# Altium PCB 咸味勺子-20210715.PcbDoc
Units mm, origin at the board's own origin, x right, y up, seen from the top; angles counter-clockwise.
Board outline 22 x 73.69 mm, 2 copper layers (Top Layer, Bottom Layer); 62 components, 36 nets, 177 pads, 22 vias.
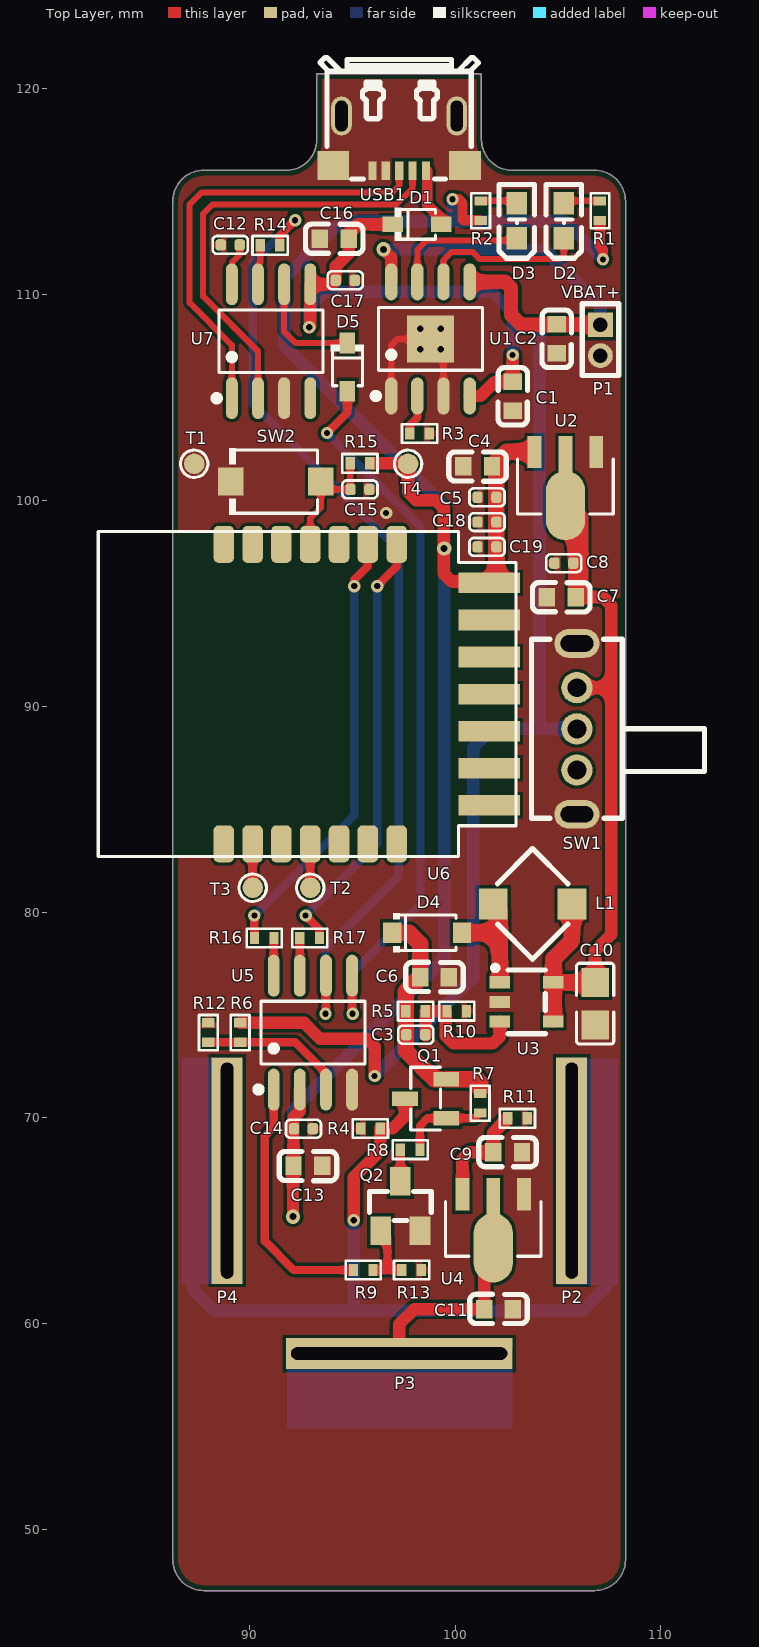
[diagram p0: Top Layer view]
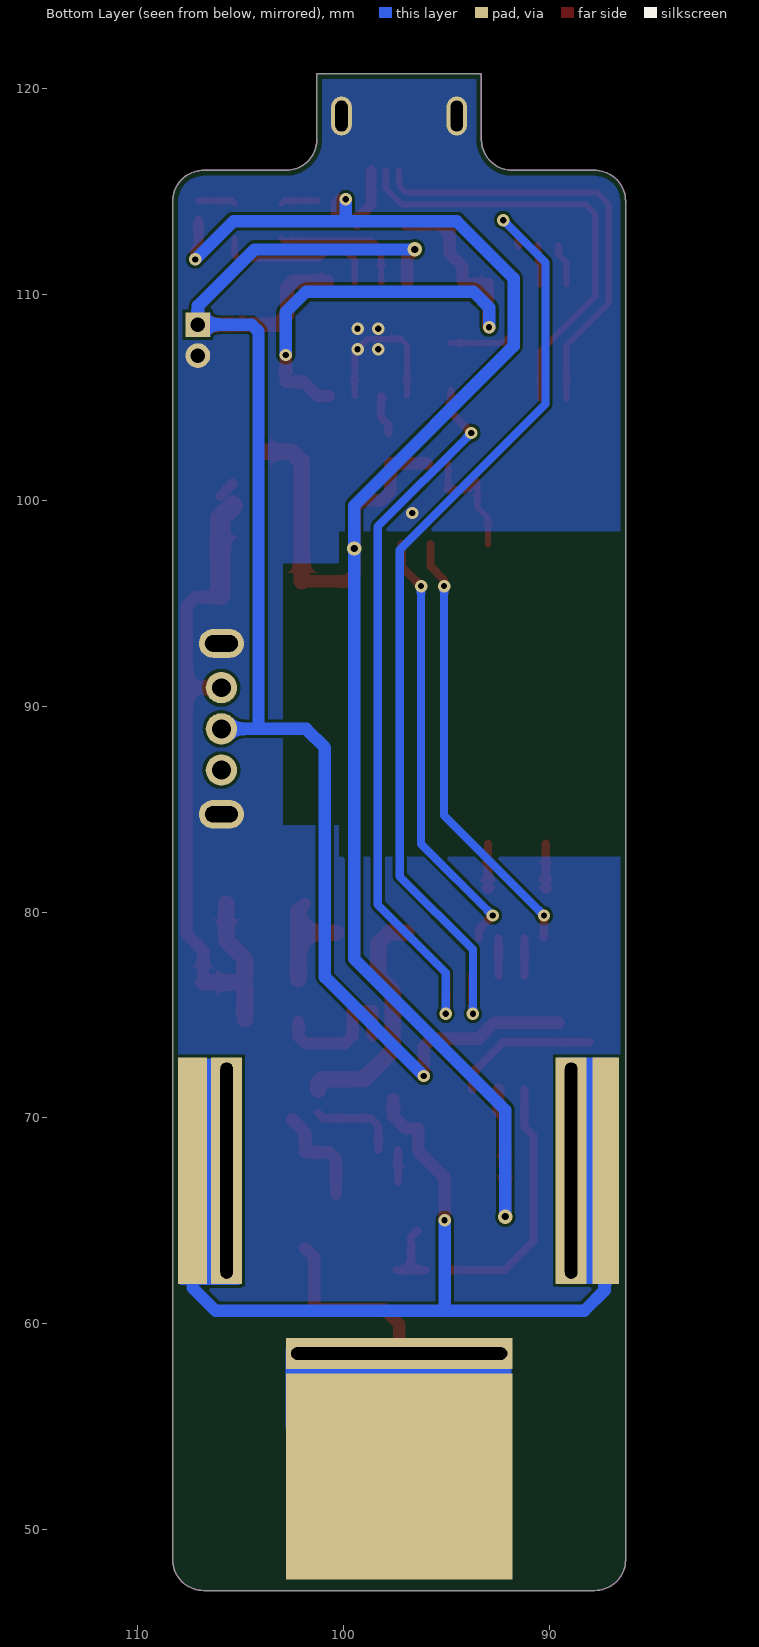
[diagram p1: Bottom Layer view, seen from below]

## Layer stack, top to bottom
Top Solder: solder mask 0.0102, Solder Resist, Dk 3.5
Top Layer: signal copper 0.0356
Dielectric 1: dielectric 0.32, FR-4, Dk 4.8
Bottom Layer: signal copper 0.0356
Bottom Solder: solder mask 0.0102, Solder Resist, Dk 3.5

## Board outline
86.282,48.534 ccw(c87.782,48.534) 87.782,47.034 106.782,47.034 ccw(c106.782,48.534) 108.282,48.534 108.282,114.534 ccw(c106.782,114.534) 106.782,116.034 102.782,116.034 cw(c102.782,117.534) 101.282,117.534 101.282,120.726 93.282,120.726 93.282,117.534 cw(c91.782,117.534) 91.782,116.034 87.782,116.034 ccw(c87.782,114.534) 86.282,114.534

## Design rules (kind name [scope] priority, off if disabled: settings)
BoardOutlineClearance [All] p1: gap=0.254 ignorepadtopadclearanceinfootprint=FALSE except(0: Arc-SplitContinuation Track-SplitContinuation SMDPad-SplitContinuation THPad-SplitContinuation Via-SplitContinuation Fill-SplitContinuation Poly-SplitContinuation Region-SplitContinuation Text-SplitContinuation)
Clearance outline [InPoly vs OnLayer('Keep-Out Layer')] p1: gap=0.254 ignorepadtopadclearanceinfootprint=FALSE except(0: Arc-Hole Track-Hole SMDPad-Hole THPad-Hole Via-Hole Fill-Hole Poly-Hole Region-Hole Text-Hole)
Clearance same-via [IsVia vs IsVia] p2: gap=0 ignorepadtopadclearanceinfootprint=FALSE except(0.076: SMDPad-Via; 0.152: Via-Via)
Clearance [All] p3: gap=0.152 ignorepadtopadclearanceinfootprint=FALSE except(0: Arc-Hole Track-Hole SMDPad-Hole THPad-Hole Via-Hole Fill-Hole Poly-Hole Region-Hole Text-Hole)
ComponentClearance [All] p1: gap=0 collisioncheckmode=3 verticalgap=0 showdistances=FALSE
MinimumSolderMaskSliver [All] p1: minsoldermaskwidth=0.076
PolygonConnect IsPad [All] p1: connectstyle=Direct reliefconductorwidth=0.254 reliefentries=4 polygonreliefangle="90 Angle" airgapwidth=0.254
PolygonConnect Other [All] p2: connectstyle=Direct reliefconductorwidth=0.254 reliefentries=4 polygonreliefangle="90 Angle" airgapwidth=0.254
RoutingVias [All] p1: holewidth=0.203 width=0.406 viastyle="Through Hole" minholewidth=0.2 minwidth=0.3 maxholewidth=0.6 maxwidth=1
SilkToSilkClearance [All] p1: silktosilkclearance=0.01
SilkToSolderMaskClearance [IsPad] p1: minsilkscreentomaskgap=0.01 clearancetoexposedcopper=TRUE
SolderMaskExpansion [All] p1: expansion=0.051
Width [All] p1: maxlimit=5 minlimit=0.152 preferedwidth=0.178
26 further rules are at their usual default settings.

## Components (designator, comment, footprint, x,y, rotation, side; value= is the part's Value field where it differs from the comment)
C1 "106" C0603 102.794,105.054 r270 top
C2 "10uF/16V" C0603 104.927,107.848 r270 top
C3 "22pF" C0402_GRM15 98.092,74.041 r0 top
C4 "106" C0603 101.092,101.651 r180 top
C5 "104" C0402_GRM15 101.549,100.152 r180 top
C6 "1uF" C0603 98.998,76.835 r0 top
C7 "106" C0603 105.156,95.301 r180 top
C8 "104" C0402_GRM15 105.283,96.952 r180 top
C9 "106" C0603 102.551,68.326 r0 top
C10 "4.7uF" JMK212BJ475KG-T 107.152,79.353 r90 top
C11 "106" C0603 102.108,60.706 r0 top
C12 "0.1uF/50V" C0402_GRM15 89.075,112.412 r180 top
C13 "22uF/16V" C0603 92.848,67.666 r180 top
C14 "0.1uF/16V" C0402_GRM15 92.634,69.469 r180 top
C15 "104/10V" C0402_GRM15 95.377,100.533 r0 top
C16 "10uF/16V" C0603 94.132,112.7 r0 top
C17 "0.1uF/16V" C0402_GRM15 94.666,110.693 r180 top
C18 "104" C0402_GRM15 101.549,98.946 r180 top
C19 "103" C0402_GRM15 101.549,97.739 r180 top
D1 "1N5819WS" 1N5819WS 101.049,113.244 r0 top
D2 "绿色" OSR50603C1E 157.836,581.279 r90 top
D3 "红色" OSR50603C1E 155.55,581.279 r90 top
D4 "MBR0530" MBR0530 101.077,77.544 r0 top
D5 "1N5819WS" 1N5819WS 94.6,103.573 r270 top
L1 "6.8uH" CDRH3D23NP-6R8PC 107.288,81.948 r45 top
P1 "锂电池" "1.5mm 2p接插件" 107.061,108.534 r270 top
P2 "CON1" 焊点1#1 107.442,66.929 r0 top
P3 "CON1" 焊点1#2 97.917,60.325 r90 top locked
P4 "CON1" 焊点1#1 90.703,66.929 r0 top
Q1 "AO3401A" AO3401A 100.626,70.346 r0 top
Q2 "CJ2312" CJ2312 96.732,63.044 r270 top
R1 "102" R0402 107.036,114.071 r270 top
R2 "102" R0402 101.244,114.071 r270 top
R3 "222" R0402 98.273,103.251 r0 top
R4 "10K" R0402 95.885,69.486 r180 top
R5 "1.5M/%1" R0402 98.077,75.184 r180 top
R6 "100K/1%" R0402 89.56,74.143 r90 top
R7 "103" R0402 101.219,70.706 r270 top
R8 "10K" R0402 97.815,68.453 r180 top
R9 "103" R0402 95.537,62.611 r0 top
R10 "270k/%1" R0402 100.076,75.184 r180 top
R11 "100K/1%" R0402 103.03,69.977 r180 top
R12 "100K/1%" R0402 88.011,74.143 r270 top
R13 "104" R0402 97.884,62.611 r180 top
R14 "100R" R0402 91.008,112.395 r0 top
R15 "104/1%" R0402 95.376,101.803 r0 top
R16 "100R" R0402 90.729,78.74 r0 top
R17 "100R" R0402 92.931,78.74 r180 top
SW1 "SK12D07VG4" SK12D07VG4 105.918,88.9 r90 top locked
SW2 "TS-1088R" TS-1088R-02026 89.261,102.532 r180 top
T1 "TP" TP1 95.317,99.164 r0 top
T2 "TP" TP1 100.955,78.565 r0 top
T3 "TP" TP1 98.161,78.565 r0 top
T4 "TP" TP1 105.705,99.164 r0 top
U1 "XT2051Y2ASR-G" XT2051Y2ASR-G 100.584,105.408 r0 top
U2 "MD5333" MD5333 220.411,288.306 r90 top
U3 "TPS61040DBVR" TPS61040DBVR 99.306,75.377 r180 top
U4 "MD5333" MD5333 216.905,252.238 r90 top
U5 "STC8G1K08A-36I-SOP8" STC8G1K08A-36I-SOP8 97.662,73.658 r0 top
U6 "BTU" CBU1 96.052,83.375 r90 top locked
U7 "CH340N" CH340N 92.836,105.596 r0 top
USB1 "U-F-M5DS-Y-8" U-F-M5DS-Y-8 97.282,117.348 r180 top locked

## Footprints (in the part's own frame and the unit in brackets; to place one, negate y for a bottom-side part, rotate by r counter-clockwise, add the part's x,y. Pads: shape width x height; smd on the part's side, far side on the other; paste and mask are expansions set on the pad)
"1.5mm 2p接插件" [mm]
  rect 1.2x1.2 hole 0.7: 1(0,0)
  round 1.2 hole 0.7: 2(1.5,0)
  silkscreen extent -1.02,-0.89 2.47,0.89
1N5819WS [mm] "SOD323"
  rect 1x0.75 smd: 1(-4.072,0.167) 2(-1.727,0.167)
  silkscreen extent -3.98,-0.64 -2,0.97
AO3401A [mm] "SOT-23"
  rect 1.25x0.7 smd: 1(-1.058,-0.364) 2(-1.058,1.536) 3(-3.058,0.586)
  silkscreen extent -2.78,-0.94 -1.33,2.11
C0402_GRM15 [mm] "适用Murata GRM15封装"
  rrect50% 0.508x0.55 smd paste+0 mask+0.051: 1(-0.46,0) 2(0.46,0)
  Top Layer pour cut-out: 0.864,-0.458 0.864,-0.152 0.48,-0.152 0.48,-0.457
  Top Layer pour cut-out: -0.152,0.432 0.152,0.432 0.152,-0.432 -0.152,-0.432
  Top Layer pour cut-out: 0.864,0.458 0.864,0.152 0.48,0.152 0.48,0.457
  Top Layer pour cut-out: -0.864,-0.458 -0.864,-0.152 -0.48,-0.152 -0.48,-0.457
  Top Layer pour cut-out: -0.864,0.458 -0.864,0.152 -0.48,0.152 -0.48,0.457
  silkscreen extent -0.85,-0.43 0.85,0.44, body extent -0.5,-0.25 0.5,0.25, height 0.5
C0603 [mm]
  rect 0.8x0.9 smd: 1(-0.7,0) 2(0.7,0)
  silkscreen extent -1.4,-0.7 1.4,0.72
CBU1 [mm]
  rrect50% 1.8x1 smd paste-1: 1(-0.063,7.291) 2(-0.063,5.891) 3(-0.063,4.491) 4(-0.063,3.091) 5(-0.063,1.691) 6(-0.063,0.291) 7(-0.063,-1.109) 15(14.491,-1.109) 16(14.491,0.291) 17(14.491,1.691) 18(14.491,3.091) 19(14.491,4.491) 20(14.491,5.891) 21(14.491,7.291)
  rect 1x3 smd paste-3: 8(1.814,-5.609) 9(3.614,-5.609) 10(5.414,-5.609) 11(7.214,-5.609) 12(9.014,-5.609) 13(10.814,-5.609) 14(12.614,-5.609)
  silkscreen extent -0.69,-6.91 15.11,13.39
CDRH3D23NP-6R8PC [mm] "6.8uH ±25% 0.75A   SMD"
  rect 1.5x1.4 smd rot 45: 1(-4.944,2.742) 2(-2.243,0.042)
  silkscreen extent -5.49,-0.51 -1.69,3.29
CH340N [mm] "SOP-8"
  oval 0.574x2.036 smd: 1(-3.682,-0.633) 2(-2.412,-0.633) 3(-1.142,-0.633) 4(0.128,-0.633) 5(0.128,4.902) 6(-1.142,4.902) 7(-2.412,4.902) 8(-3.682,4.902)
  silkscreen extent -4.57,-0.78 0.75,3.66
CJ2312 [mm] "SOT-23(SOT-23-3)"
  rect 1.4x1 smd: 1(-1.472,-0.339) 2(-1.472,1.561) 3(-3.872,0.611)
  silkscreen extent -3.37,-0.89 -1.97,2.11
JMK212BJ475KG-T [mm] "0805"
  rect 1.41x1.35 smd: 1(-4.832,0.345) 2(-2.772,0.345)
  silkscreen extent -5.77,-0.56 -1.84,1.25
MBR0530 [mm] "SOD-123"
  rect 0.88x0.99 smd: 1(-4.132,1.45) 2(-0.747,1.45)
  silkscreen extent -4.07,0.51 -1.03,2.39
MD5333 [mm] "SOT89-3"
  rect 1.575x0.672 smd: 1(-185.956,113.551) 3(-185.956,116.551)
  oval 3.372x1.898 smd: 2(-188.56,115.051)
  rect 1.833x0.672 smd: 2(-186.086,115.051)
  silkscreen extent -188.96,112.73 -186.31,117.38
OSR50603C1E [mil]
  rect 43x39 smd: 1(-18380,2069) 2(-18447,2069)
  silkscreen extent -18485,2035 -18344,2103
R0402 [mm]
  rect 0.45x0.6 smd paste+0 mask+0.051: 1(-0.475,0) 2(0.475,0)
  Top Layer pour cut-out: -0.889,-0.178 -0.889,-0.483 -0.509,-0.483 -0.509,-0.178
  Top Layer pour cut-out: -0.889,0.178 -0.889,0.483 -0.509,0.483 -0.509,0.178
  Top Layer pour cut-out: 0.889,-0.178 0.889,-0.483 0.509,-0.483 0.509,-0.178
  Top Layer pour cut-out: 0.889,0.178 0.889,0.483 0.509,0.483 0.509,0.178
  Top Layer pour cut-out: -0.189,-0.453 -0.189,0.452 0.19,0.452 0.19,-0.453
  silkscreen extent -0.85,-0.45 0.85,0.45, body extent -0.5,-0.25 0.5,0.25, height 0.35
SK12D07VG4 [mil] "Through Hole,P=2mm   3脚2二档位SK12D07VG4滑动开关1P2T卧式"
  round 60 hole 36: 1(-78.74,0) 2(0,0) 3(78.74,0)
  oval 55.12x86.61 hole 31.5 slot 62.99 at 90 deg: 4(163.38,0) 5(-163.39,0)
  silkscreen extent -171,-244 171,87
STC8G1K08A-36I-SOP8 [mm] "SOP8"
  oval 0.574x2.036 smd: 1(-6.476,-2.284) 2(-5.206,-2.284) 3(-3.936,-2.284) 4(-2.666,-2.284) 5(-2.666,3.251) 6(-3.936,3.251) 7(-5.206,3.251) 8(-6.476,3.251)
  silkscreen extent -7.37,-2.43 -2.05,2
TP1 [mm]
  round 1 smd: 1(-7.991,2.614)
  silkscreen extent -8.65,1.95 -7.33,3.28
TPS61040DBVR [mm] "SOT-23-5   DC-DC电源芯片"
  rect 1x0.6 smd: 1(-2.869,-1.204) 2(-2.869,-0.254) 3(-2.869,0.696) 4(-5.469,0.696) 5(-5.469,-1.204)
  silkscreen extent -5.07,-2.03 -2.52,1.3
TS-1088R-02026 [mm] "SMD,3x4x2.0mm"
  rect 1.23x1.36 smd: 1(-4.211,1.617) 2(0.159,1.617)
  silkscreen extent -4.05,0 0.23,3.23
U-F-M5DS-Y-8 [mm]
  rect 0.4x0.9 smd: 1(-1.3,1.326) 2(-0.65,1.326) 3(0,1.326) 4(0.65,1.326) 5(1.3,1.326)
  rect 1.54x1.4 smd: 6(3.2,1.076) 7(-3.2,1.075)
  oval 1x1.9 hole 0.6 slot 1.5 at 90 deg: 8(-2.8,-1.326) 9(2.8,-1.326)
  silkscreen extent -3.85,-4.17 3.85,1.74
XT2051Y2ASR-G [mm]
  oval 0.6x1.8 smd: 1(-3.687,-0.336) 2(-2.417,-0.336) 3(-1.147,-0.336) 4(0.123,-0.336) 5(0.123,5.209) 6(-1.147,5.209) 7(-2.417,5.209) 8(-3.687,5.209)
  rect 2.29x2.29 smd: 9(-1.782,2.436)
  silkscreen extent -4.58,-0.49 0.74,3.96
焊点1#1 [mm]
  rect 1.5x11 hole 0.6 slot 10.5 at 90 deg: 1(-1.778,0.508)
焊点1#2 [mm]
  rect 1.5x11 hole 0.6 slot 10.5 at 90 deg: 1(-1.778,0.635)

## Part data
C1 C13 C16: library part 1.02.03.00181, "无极性电容"
C2 C3 C4 C5 C6 C7 C8 C9 C11 C15 C18 C19: library part 1.02.05.00869, "无极性电容"
C12 C14 C17: library part 1.02.05.00834, "无极性电容"
D1 D5: library part 1N5819WS_C1884554
D2 D3: library part 1.06.02.00452, "LED"
D4: library part MBR0530_C475718
P1: library part CON2, "Connector"
Q1: library part AO3401A_C700954
Q2: library part 1.06.11.00008, "N-Channel MOSFET"
R1 R2 R3 R14 R15 R16 R17: library part 1.01.01.00808, "电阻"
R4 R5 R8 R10: library part 100K/1%, "电阻"
R6 R11 R12: "电阻"
R7 R9 R13: library part RES-1, "RES"
SW2: library part TS-1088R-02026

## Free pads (board coordinates)
  rect 1.3x11 smd far side: 19(87.249,67.437)
  rect 11x10 smd far side: 19(97.282,52.578)
  rect 1.4x11 smd far side: 19(107.315,67.437)

## Via types
v1: diameter 0.6, hole 0.3, Top Layer to Bottom Layer, 15 vias
v2: diameter 0.61, hole 0.305, Top Layer to Bottom Layer, 4 vias
v3: diameter 0.7, hole 0.35, Top Layer to Bottom Layer, 3 vias

## Nets (pads, with @x,y where several pads share a name; then routed paths per layer and width w, separated by ;. In a path a pad name is that pad's centre, name@x,y a point inside that pad or via, vN(x,y) a via of type N, cw(c..) or ccw(c..) an arc to the next point about the centre after c; other vN are vias at no path point)
3V3: C4.1 C5.1 C13.2 C14.2 C18.1 C19.1 R1.2 R2.2 R15.2 T4.1 U2.3 U5.2 U6.14 | length 99.6
  Top Layer w0.5: v1(99.873,114.63) 100.178,114.63 100.355,114.452 100.355,113.665 100.416,113.604 R2.2@101.168,113.604 ; R1.2@107.036,113.563 107.036,112.344 107.188,112.192 v1(107.188,111.709)
  Top Layer w0.6: v3(92.126,65.202) 92.126,67.643 C13.2 92.148,70.025 92.456,70.333 U5.2 ; R15.2@95.936,101.803 97.688,101.803 T4.1 97.714,100.406 98.12,100 99.06,100 99.441,99.619 99.441,96.444 99.822,96.063 U6.14@102.009,96.063
  Top Layer w0.8: U6.14@102.009,96.063 102.009,101.857 102.514,102.362 U2.3@103.759,102.362
  Bottom Layer w0.6: v3(92.126,65.202) 92.126,70.383 99.466,77.724 v3(99.466,97.663) 99.466,99.746 91.719,107.493 91.719,110.795 94.488,113.563 99.924,113.563 ; v1(99.873,114.63) 99.873,113.614 99.924,113.563 ; v1(107.188,111.709) 105.334,113.563 99.924,113.563
ADC: R6.1 R12.2 U5.3 | length 7.1
  Top Layer w0.4: R12.2 92.245,73.668 93.726,72.187 U5.3
BTU_RXD1: R16.1 U6.16 | length 21.5
  Top Layer w0.4: v1(90.246,79.832) 90.246,78.748 R16.1 ; v1@95.098,95.758 v1(95.098,95.834) 95.098,96.139 95.761,96.802 U6.16
  Bottom Layer w0.4: v1(90.246,79.832) 95.098,84.684 v1(95.098,95.834)
BTU_TXD1: R17.1 U6.15 | length 21.3
  Top Layer w0.4: v1(92.735,79.832) 93.406,79.162 R17.1 R17.1@93.421,78.755 ; v1(96.215,95.834) 97.161,96.78 U6.15
  Bottom Layer w0.4: v1(92.735,79.832) 96.215,83.312 v1(96.215,95.834)
D+: U7.1 USB1.3 | length 21.6
  Top Layer w0.3: U7.1 89.154,107.544 87.097,109.601 87.097,114.376 87.681,114.96 96.952,114.96 97.282,115.291 USB1.3
D-: U7.2 USB1.2 | length 21.6
  Top Layer w0.3: U7.2 90.424,107.239 87.757,109.906 87.757,113.919 88.214,114.376 97.151,114.376 97.932,115.157 USB1.2
GND: C1.2 C2.2 C4.2 C5.2 C6.2 C7.2 C8.2 C9.2 C10.1 C11.2 C12.2 C13.1 C14.1 C15.2 C16.1 C17.1 C18.2 C19.2 P1.2 Q2.2 R3.2 R4.2 R10.1 R11.1 R12.1 R13.1 SW1.4 SW1.5 SW2.2 T1.1 U1.1 U1.3 U1.9 U2.1 U3.2 U4.1 U5.4 U6.13 U7.3 USB1.4 USB1.5 USB1.6 USB1.7 USB1.8 USB1.9 | length 7.5
  Top Layer w0.3: U1.1 96.897,107.539 97.201,107.844 U1.9 99.437,107.209 U1.3
  other v1: 96.647,99.39
  other v2: 98.302,107.344 99.302,107.344 98.302,108.344 99.302,108.344
LED1: D2.2 U1.6 | length 8.1
  Top Layer w0.3: U1.6 99.437,111.679 99.822,112.065 100.854,112.065 101.184,111.735 105.105,111.735 105.283,111.912 D2.2
LED2: D3.2 U1.7 | length 6.7
  Top Layer w0.3: U1.7@98.12,110.663 U1.7 98.167,112.187 98.611,112.632 102.904,112.632 D3.2
NetC3_2: C3.2 R5.1 R10.2 U3.3 | length 6.9
  Top Layer w0.6: C3.2@98.577,74.001 R5.1@98.577,75.184 ; R5.1@98.628,75.184 R10.2@99.517,75.184 ; R10.2@99.543,75.184 99.543,73.99 99.924,73.609 101.829,73.609 102.175,73.956 U3.3
NetC9_1: C9.1 R11.2 U4.3 | length 5.2
  Top Layer w0.6: U4.3 100.354,67.994 100.686,68.326 C9.1 101.851,69.273 R11.2@102.497,69.919
NetC11_1: C11.1 P3.1 pad.19@97.282,52.578 U4.2 | length 9
  Top Layer w0.4: P3.1 P3.1@97.309,58.574
  Top Layer w0.6: P3.1 97.282,59.969 98.019,60.706 C11.1 101.408,63.232 U4.2@101.854,63.678
NetC12_1: C12.1 U7.8 | length 2.1
  Top Layer w0.3: U7.8 89.154,111.554 89.535,111.935 C12.1
NetD1_2: D1.2 USB1.1 | length 2.9
  Top Layer w0.5: USB1.1@98.642,116.01 98.642,114.363 99.322,113.682 D1.2
NetD2_1: D2.1 R1.1 | length 1.8
  Top Layer w0.3: D2.1 105.41,114.554 R1.1@107.061,114.554
NetD3_1: D3.1 R2.1 | length 1.8
  Top Layer w0.3: R2.1@101.244,114.554 102.87,114.554 D3.1
NetD4_2: D4.2 L1.1 U3.1 | length 5.6
  Top Layer w0.6: L1.1 L1.1@102.175,80.07
  Top Layer w0.8: D4.2 102.175,78.994 ; U3.1@102.175,76.733 102.175,78.994 ; L1.1@102.175,80.07 102.175,78.994
NetD5_1: D5.1 U7.6 | length 5.6
  Top Layer w0.3: U7.6 91.694,108.204 92.253,107.645 D5.1
NetQ1_1: Q1.1 R7.2 R8.1 | length 4.3
  Top Layer w0.4: R8.1 98.29,69.614 98.659,69.982 Q1.1 100.97,69.982 R7.2
NetQ2_1: Q2.1 R9.2 R13.2 | length 3.4
  Top Layer w0.4: R9.2 96.71,62.611 ; Q2.1 96.71,64.198 96.71,62.611 ; R13.2 96.71,62.611
NetQ2_3: Q2.3 R8.2 | length 1.5
  Top Layer w0.4: R8.2 97.343,68.45 Q2.3
NetR3_1: R3.1 U1.2 | length 2.1
  Top Layer w0.4: R3.1 97.798,103.665 98.167,104.034 U1.2 U1.2@98.069,104.973
NetR14_1: R14.1 U7.7 | length 1.9
  Top Layer w0.3: U7.7 90.424,111.455 90.533,111.564 R14.1
P5.4: R9.1 U5.1 | length 12.4
  Top Layer w0.4: U5.1 91.186,69.545 90.754,69.113 90.754,64.008 92.151,62.611 R9.1
PD7: T3.1 U6.2 | length 2.1
  Top Layer w0.4: T3.1@90.161,81.187 U6.2
  Top Layer w0.6: T3.1@90.161,81.187 T3.1
RESETB: C15.1 R15.1 SW2.1 U6.18 | length 6.1
  Top Layer w0.3: U6.18 92.961,99.133 93.472,99.644 SW2.1 93.853,100.533 C15.1 ; C15.1@94.901,100.549 R15.1
  Top Layer w0.4: C15.1@94.901,100.549 C15.1
RXD: D5.2 U5.5 | length 35.8
  Top Layer w0.4: v1@93.828,103.276 v1(93.777,103.276) 94.767,104.267 D5.2 ; U5.5 94.996,75.082 v1(95.021,75.057)
  Bottom Layer w0.4: v1(93.777,103.276) 98.323,98.73 98.323,80.366 95.021,77.064 v1(95.021,75.057)
RXD1: R17.2 U5.7 | length 1.8
  Top Layer w0.4: U5.7 R17.2
SWS: T2.1 U6.4 | length 2.1
  Top Layer w0.4: T2.1@92.961,81.181 U6.4
  Top Layer w0.6: T2.1@92.961,81.181 T2.1
TXD: R14.2 U5.6 | length 47.2
  Top Layer w0.4: R14.2 91.483,112.87 v1(92.227,113.614) ; v1(93.701,75.057) 93.726,75.082 U5.6
  Bottom Layer w0.4: v1(92.227,113.614) 90.17,111.557 90.17,104.673 97.257,97.587 97.257,81.737 93.701,78.181 v1(93.701,75.057)
TXD1: R16.2 U5.8 | length 1.8
  Top Layer w0.4: U5.8 R16.2@91.186,78.74
USB_5V: C1.1 C16.2 C17.2 D1.1 U1.4 U7.5 | length 25.6
  Top Layer w0.6: v1(92.913,108.407) 92.964,108.458 U7.5 94.011,110.498 C17.2 94.206,111.376 94.832,112.003 C16.2 94.832,112.968 95.275,113.411 D1.1 ; U1.4 101.236,105.071 101.919,105.754 C1.1 v1(102.794,107.061)
  Bottom Layer w0.6: v1(92.913,108.407) 92.913,109.372 93.675,110.134 101.803,110.134 102.794,109.144 v1(102.794,107.061)
V_OUT: P2.1 P4.1 pad.19@87.249,67.437 pad.19@107.315,67.437 Q1.3 R4.1 | length 46.3
  Top Layer w0.6: v1(95.072,65.024) 95.072,67.107 96.36,68.395 R4.1 96.969,69.486 97.568,70.085 Q1.3
  Bottom Layer w0.6: pad.19@87.249,67.437 87.3,67.437 87.3,61.62 88.29,60.63 95.098,60.63 ; v1(95.072,65.024) 95.072,60.655 95.098,60.63 ; P2.1 pad.19@107.163,67.437 ; pad.19@107.163,67.894 pad.19@107.163,67.437 ; 95.098,60.63 106.197,60.63 107.315,61.747 107.315,67.437 pad.19@107.163,67.437
VBAT: C2.1 P1.1 R6.2 SW1.2 U1.5 U1.8 | length 76.6
  Top Layer w0.6: R6.2 92.667,74.618 93.447,73.838 95.707,73.838 96.088,73.457 v1(96.088,72.034) ; v3(96.52,112.192) 96.897,111.815 U1.8 ; C2.1@104.902,108.661 104.927,108.661 105.054,108.534 104.942,108.534 C2.1
  Top Layer w0.7: U1.5@100.787,110.616 102.439,110.616 102.718,110.338 102.718,109.017 103.2,108.534 C2.1@104.942,108.534 ; C2.1@105.054,108.534 P1.1
  Bottom Layer w0.6: v1(96.088,72.034) 100.889,76.835 100.889,87.986 101.803,88.9 SW1.2 ; v3(96.52,112.192) 104.318,112.192 107.061,109.449 P1.1 104.445,108.534 104.115,108.204 104.115,88.925
VBAT_BOOST_8V: C3.1 C6.1 D4.1 Q1.2 R5.2 R7.1 | length 11.4
  Top Layer w0.8: D4.1 97.765,78.994 98.298,78.461 C6.1 97.602,76.139 97.602,73.264 98.984,71.882 Q1.2@99.314,71.882 ; Q1.2 101.041,71.882 101.219,71.704 R7.1@101.219,71.374
VBAT_OUT: C7.1 C8.1 C10.2 L1.2 SW1.3 U2.2 U3.4 U3.5 | length 35.4
  Top Layer w0.5: U2.2@105.385,100.813 U2.2@105.983,100.214
  Top Layer w0.6: SW1.3 107.594,90.9 ; C7.1@105.983,95.301 107.188,95.301 107.594,94.894 107.594,90.9 ; C10.2 106.807,78.13 107.594,78.918 107.594,90.9
  Top Layer w0.8: U3.4@104.775,74.778 U3.5 C10.2 ; U3.5@104.775,76.683 104.775,77.724 105.673,78.622 L1.2
  Top Layer w1: U2.2@105.359,99.746 105.983,99.122 C7.1@105.983,95.414
pads on no net: SW1.1 U6.1 U6.3 U6.5 U6.6 U6.7 U6.8 U6.9 U6.10 U6.11 U6.12 U6.17 U6.19 U6.20 U6.21 U7.4

## Polygon pours and split planes (outlines as drawn)
GND on Top Layer "Top Layer-No Net" (solid, remove dead copper, pour order 0): 86.309,48.489 ccw(c87.809,48.489) 87.809,46.989 106.809,46.989 ccw(c106.809,48.489) 108.309,48.489 108.309,114.489 ccw(c106.809,114.489) 106.809,115.989 102.809,115.989 cw(c102.809,117.489) 101.309,117.489 101.309,120.681 93.309,120.681 93.309,117.489 cw(c91.809,117.489) 91.809,115.989 87.809,115.989 ccw(c87.809,114.489) 86.309,114.489
GND on Bottom Layer "Top Layer-No Net1" (solid, remove dead copper, pour order 1): 86.233,48.311 ccw(c87.733,48.311) 87.733,46.811 106.733,46.811 ccw(c106.733,48.311) 108.233,48.311 108.233,114.311 ccw(c106.733,114.311) 106.733,115.811 102.733,115.811 cw(c102.733,117.311) 101.233,117.311 101.233,120.503 93.233,120.503 93.233,117.311 cw(c91.733,117.311) 91.733,115.811 87.733,115.811 ccw(c87.733,114.311) 86.233,114.311

## Keep-outs
Keep-Out Layer:
  the board outline again, w0.013

## Other copper
Top Layer:
  pour cut-out: 82.677,98.527 82.728,98.476 100.178,98.476 100.178,96.977 102.921,96.977 102.921,84.252 102.946,84.226 102.921,84.201 100.228,84.201 100.228,82.829 100.051,82.652 82.601,82.652 82.601,98.45
Bottom Layer:
  rectangle net V_OUT: 105.029,61.874 107.925,72.873
  rectangle net V_OUT: 86.716,61.925 89.51,72.923
  rectangle net NetC11_1: 96.571,57.125 96.596,58.826
  rectangle net NetC11_1: 91.821,54.915 102.794,58.801
  pour cut-out: 82.702,98.476 82.728,98.501 100.228,98.501 100.228,96.977 100.203,96.952 102.946,96.952 102.946,84.252 102.972,84.226 100.228,84.226 100.228,82.677 100.203,82.652 100.178,82.677 82.652,82.677 82.652,98.476 82.601,98.527

## Silkscreen, mask and mechanical layers (free items; w line width, h text height)
Top Overlay:
  text "VBAT+" at 105.156,109.83 h0.6
Mechanical 1:
  lines w0.013: 86.282,48.534 ccw(c87.782,48.534) 87.782,47.034 106.782,47.034 ccw(c106.782,48.534) 108.282,48.534 108.282,114.534 ccw(c106.782,114.534) 106.782,116.034 102.782,116.034 cw(c102.782,117.534) 101.282,117.534 101.282,120.726 93.282,120.726 93.282,117.534 cw(c91.782,117.534) 91.782,116.034 87.782,116.034 ccw(c87.782,114.534) 86.282,114.534 86.282,48.534 ; 91.782,58.034 102.782,58.034 102.782,59.034 91.782,59.034 91.782,58.034